# Altium PCB PCB1.PcbDoc (part 1 of 2)
Units mm, origin at the board's own origin, x right, y up, seen from the top; angles counter-clockwise.
Board outline 88.4 x 52.7 mm, 4 copper layers (Top Layer, Mid-Layer 1, Mid-Layer 2, Bottom Layer), stack 1.341 mm thick; 54 components, 31 nets, 188 pads, 80 vias.
Unrouted connection lines stored in the file: 1.
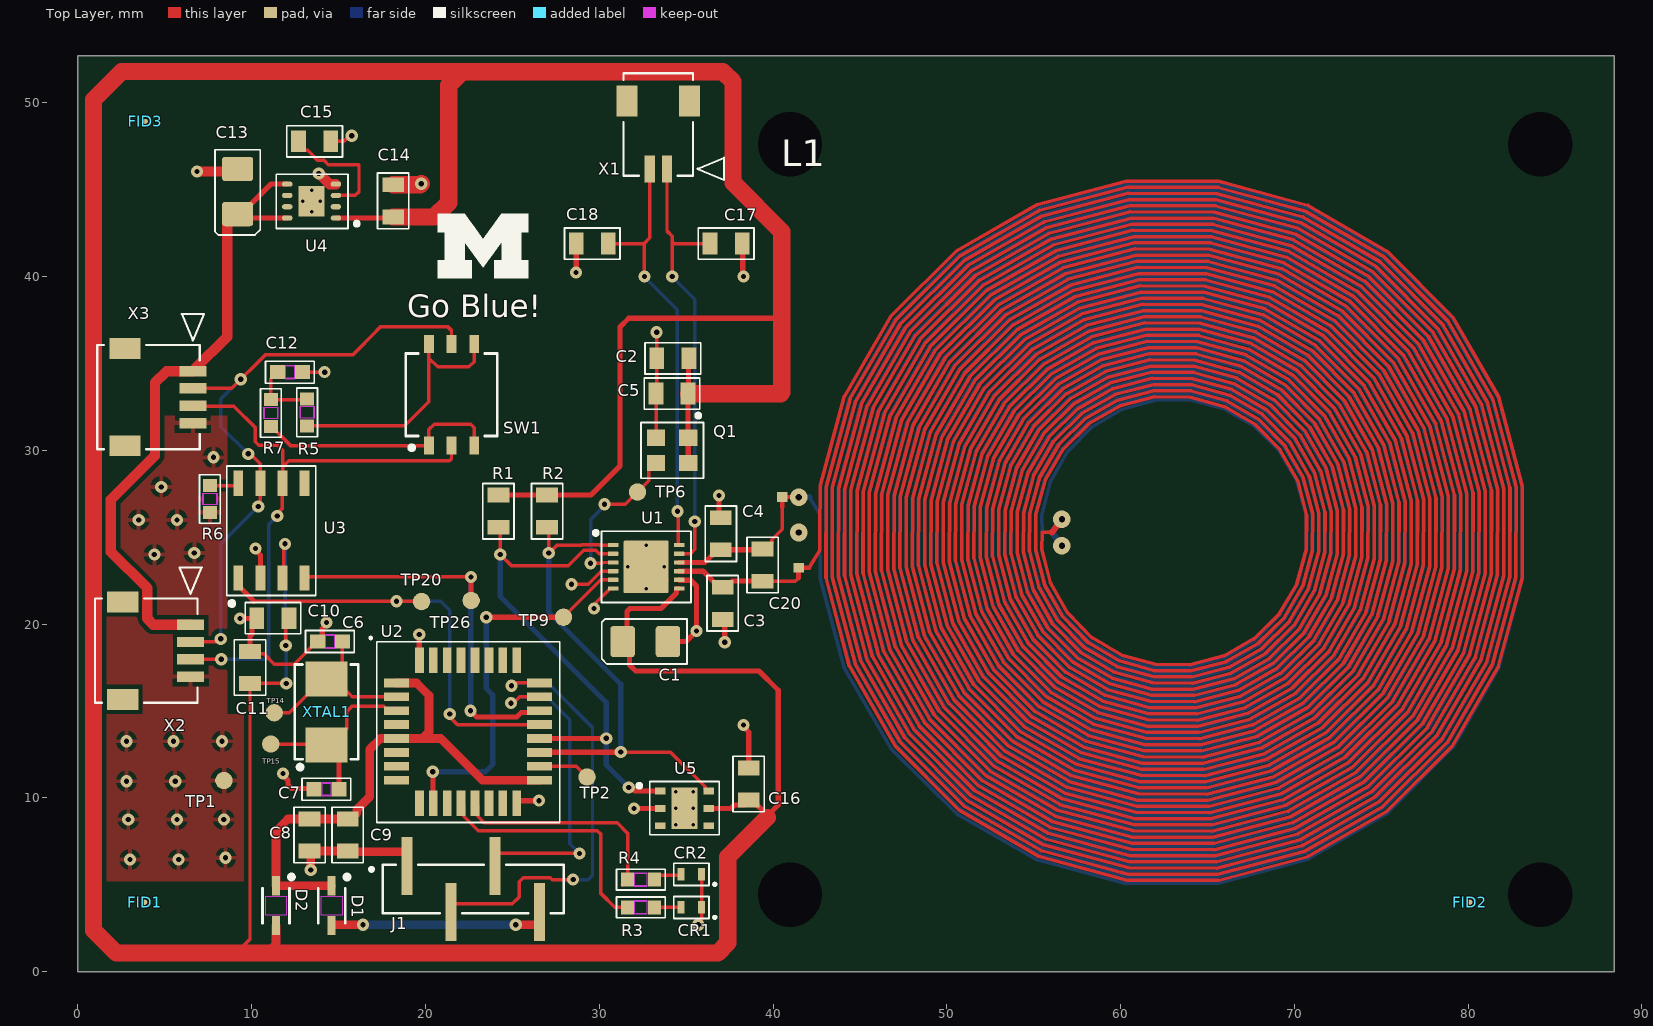
[diagram p0: Top Layer view]
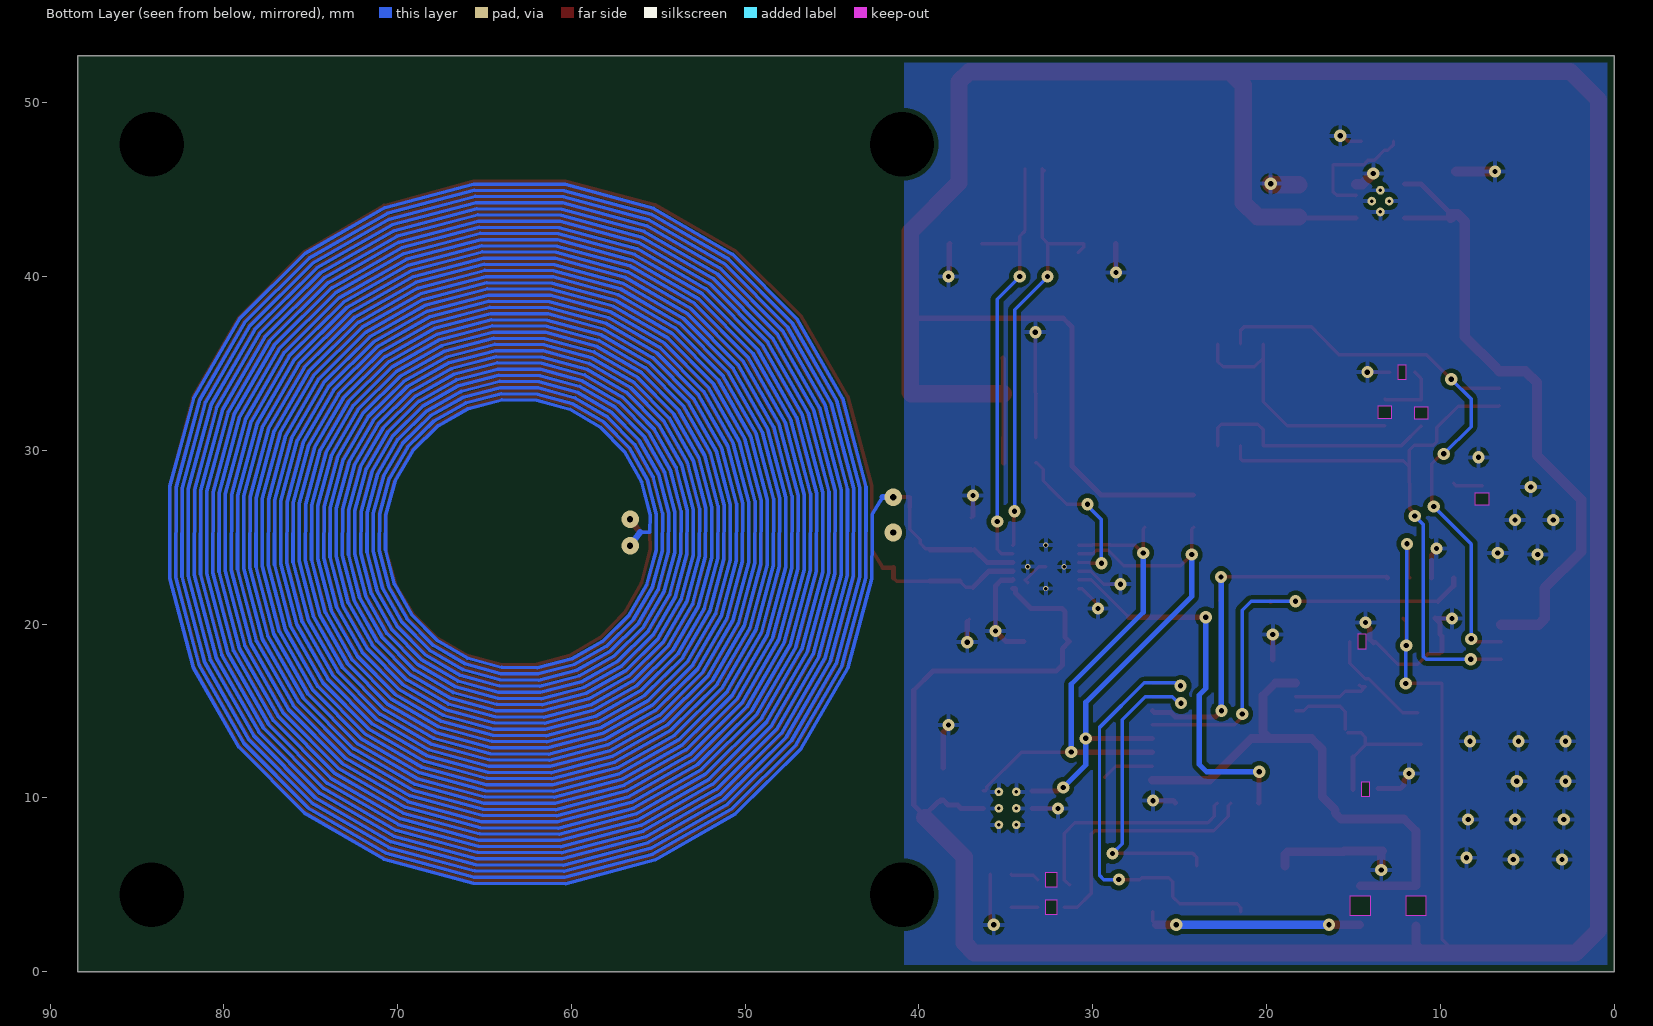
[diagram p1: Bottom Layer view, seen from below]
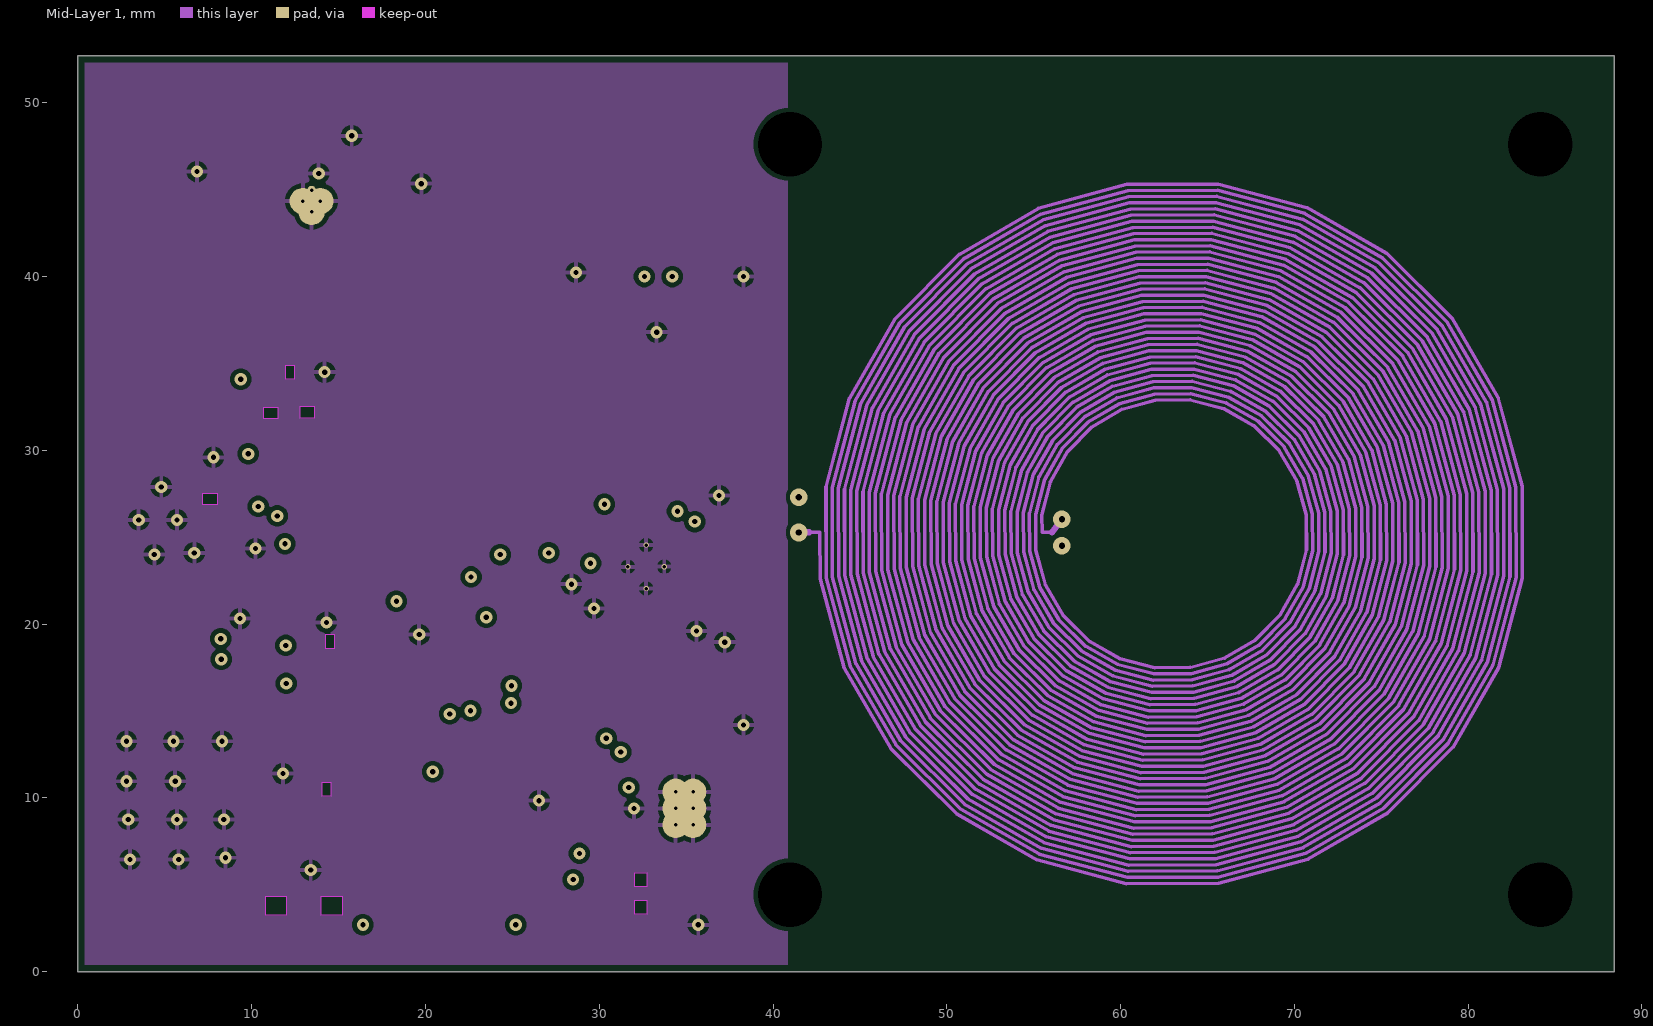
[diagram p2: Mid-Layer 1]
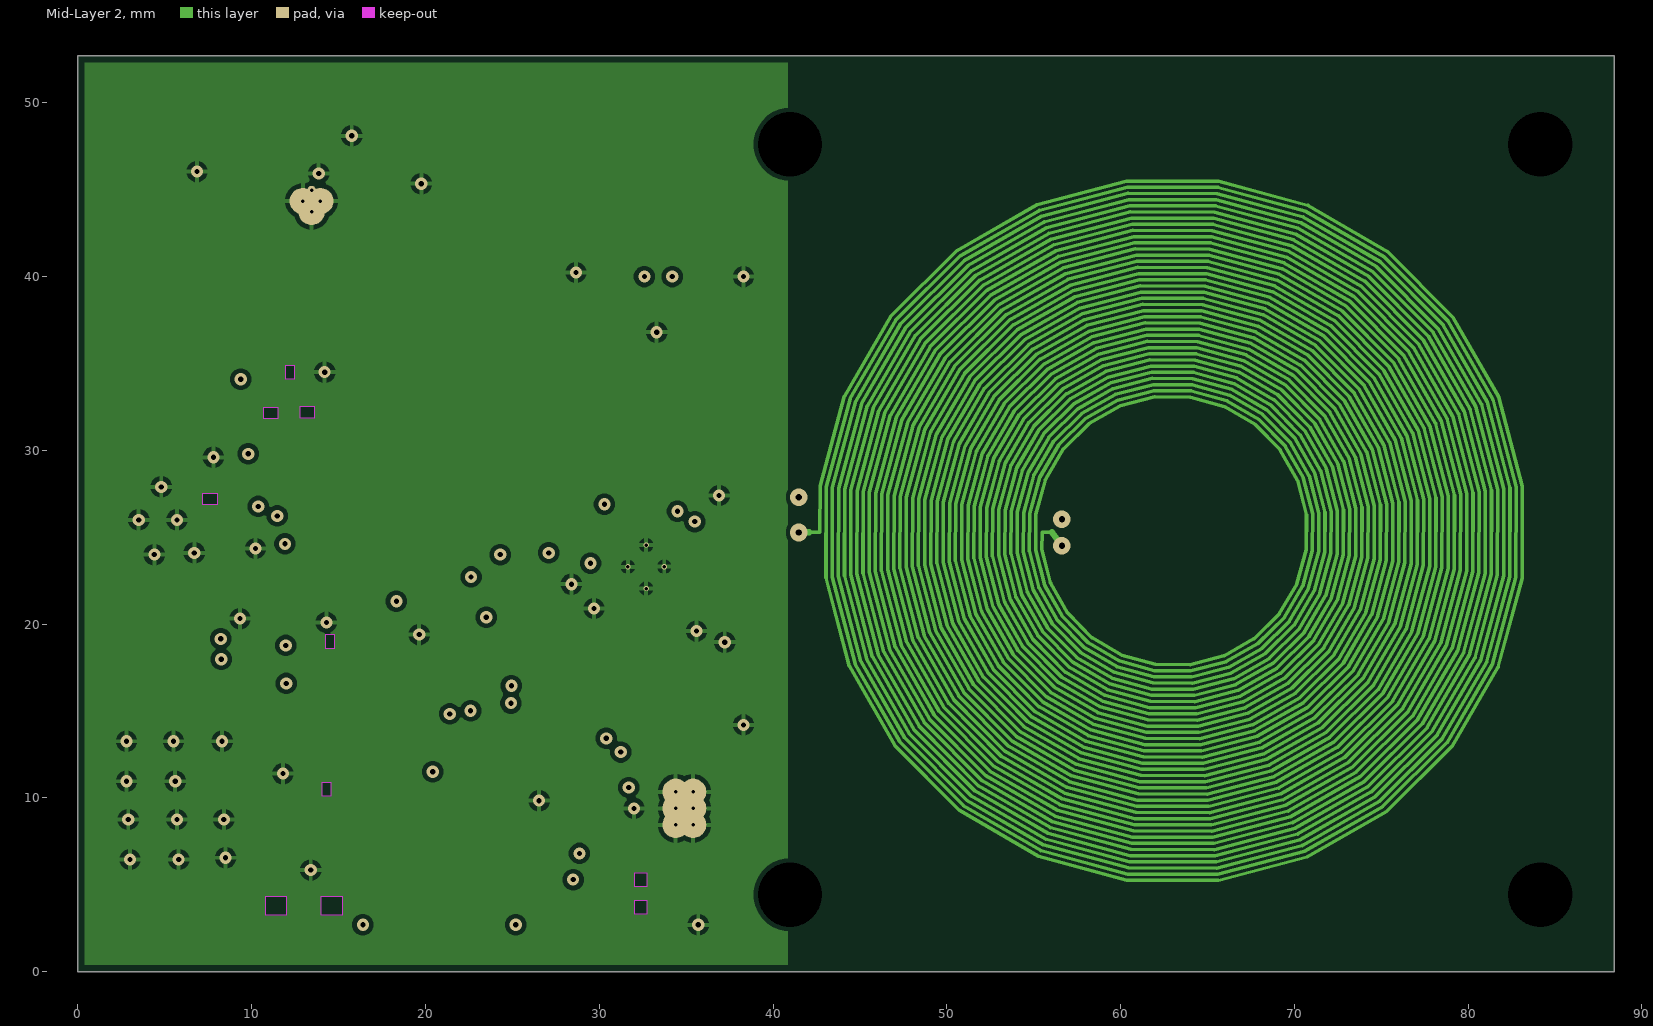
[diagram p3: Mid-Layer 2]
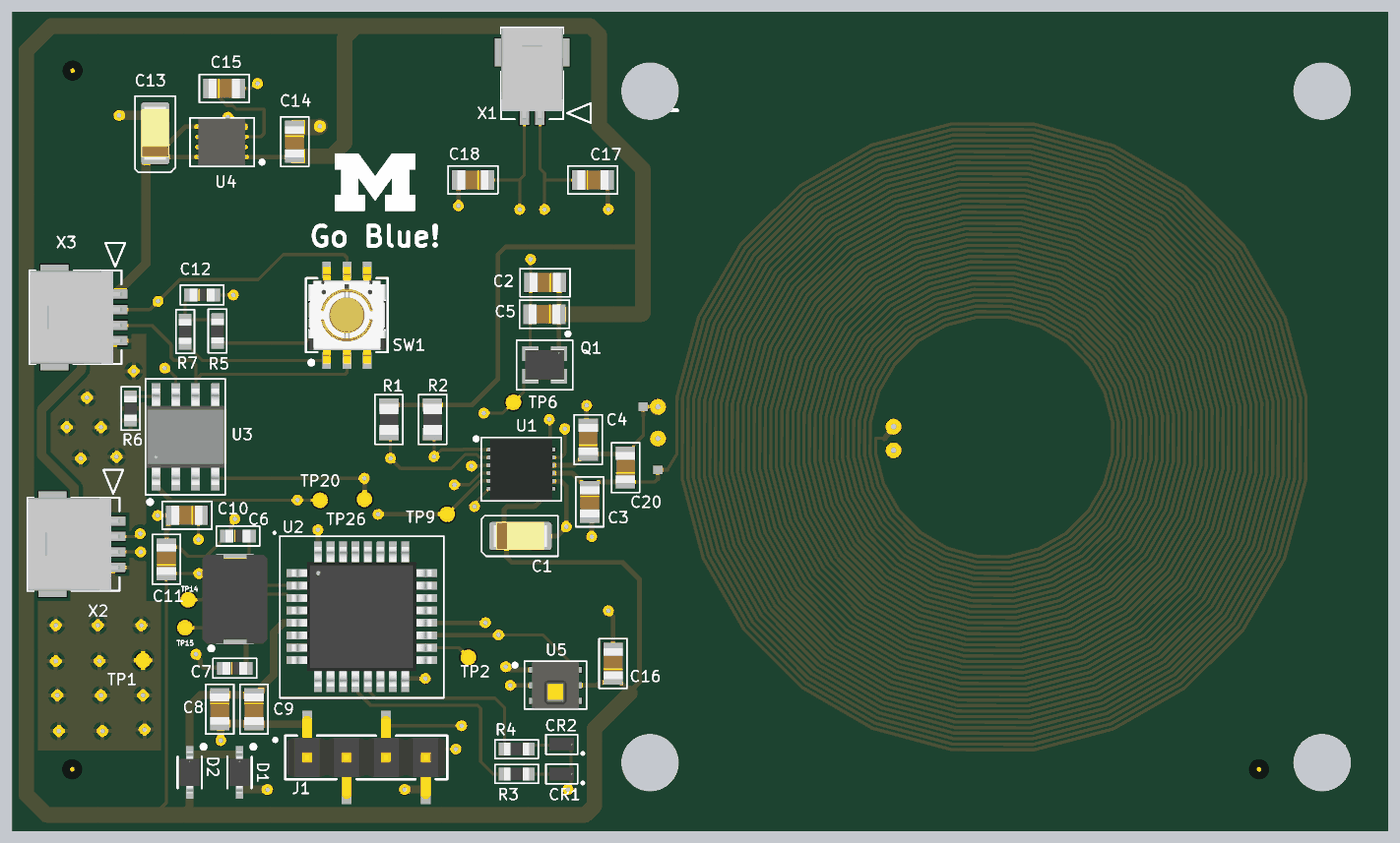
[diagram p4: 3D render of the assembled board from above, using the file's embedded part models]

## Layer stack, top to bottom
Top Solder: solder mask 0.0102, Solder Resist, Dk 3.5
Top Layer: signal copper 0.035
Dielectric 1: dielectric 0.4, FR-4, Dk 4.8
Mid-Layer 1: signal copper 0.0356
Dielectric3: dielectric 0.4, FR-4, Dk 4.8
Mid-Layer 2: signal copper 0.0356
Dielectric2: dielectric 0.4, FR-4, Dk 4.8
Bottom Layer: signal copper 0.035
Bottom Solder: solder mask 0.0102, Solder Resist, Dk 3.5

## Board outline
0,0 88.4,0 88.4,52.7 0,52.7

## Design rules (kind name [scope] priority, off if disabled: settings)
BoardOutlineClearance [All] p1: gap=0.254 ignorepadtopadclearanceinfootprint=FALSE except(0: Arc-SplitContinuation Track-SplitContinuation SMDPad-SplitContinuation THPad-SplitContinuation Via-SplitContinuation Fill-SplitContinuation Poly-SplitContinuation Region-SplitContinuation Text-SplitContinuation; 0.4: Arc-OutlineEdge Track-OutlineEdge SMDPad-OutlineEdge THPad-OutlineEdge Via-OutlineEdge Fill-OutlineEdge Poly-OutlineEdge Region-OutlineEdge Text-OutlineEdge)
Clearance keepout [IsKeepOut] p1: gap=0 ignorepadtopadclearanceinfootprint=TRUE
Clearance [All] p2: gap=0.254 ignorepadtopadclearanceinfootprint=TRUE except(0: Arc-Fill Track-Fill SMDPad-Fill THPad-Fill Via-Fill Fill-Fill Text-Hole; 0.1: Arc-Track Track-Track; 0.127: Arc-Arc SMDPad-SMDPad; 0.2: Arc-SMDPad Track-SMDPad; 0.33: Arc-THPad Track-THPad SMDPad-THPad; 0.5: Arc-Hole Track-Hole THPad-THPad THPad-Hole Via-Hole)
HoleSize [All] p1: absolutevalues=TRUE maxlimit=5 minlimit=0.2 maxpercent=80.000 minpercent=20.000
MinimumAnnularRing [All] p1: minimumring=0.13
MinimumSolderMaskSliver [All] p1: minsoldermaskwidth=0.127
PolygonConnect [All] p1: connectstyle=Relief reliefconductorwidth=0.254 reliefentries=4 polygonreliefangle="90 Angle" airgapwidth=0.254
RoutingVias [All] p1: holewidth=0.3 width=0.7 viastyle="Through Hole" minholewidth=0.3 minwidth=0.7 maxholewidth=0.711 maxwidth=1.27
SilkToSilkClearance [All] p1: silktosilkclearance=0.15
SilkToSolderMaskClearance [IsPad] p1: minsilkscreentomaskgap=0.15 clearancetoexposedcopper=FALSE
SolderMaskExpansion [All] p1: expansion=0.038 istentingtop=FALSE
UnRoutedNet [All] p1: checkbadconnections=TRUE
Width [All] p1: maxlimit=10 minlimit=0.127 preferedwidth=0.3 bottomlayer_prefwidth=0.2 minimp=50.000000 maximp=50.000000 favimp=50.000000
25 further rules are at their usual default settings.

## Classes and differential pairs
component class Sheet1: FID1 FID2 FID3
component class Sense_LDC1612: C1 C2 C3 C4 C5 C17 C18 C20 L1 Q1 R1 R2 TP6 TP9 U1 X1
component class PowerReg: C13 C14 C15 TP1 U4
component class Microcontroller_STM32F04: C6 C7 C8 C9 CR1 CR2 D1 D2 J1 R3 R4 TP2 TP14 TP15 U2 XTAL1
component class HumTempSensor: C16 U5
component class CAN_TxRx: C10 C11 C12 R5 R6 R7 SW1 TP20 TP26 U3
component class BoardIF: X2 X3

## Components (designator, comment, footprint, x,y, rotation, side; value= is the part's Value field where it differs from the comment)
C1 "10uF" CAP1206_TAJA 32.5,19.1 r0 top value="10uF 16V 10% Tantalum"
C2 "1uF" CAP0805 34.237,35.295 r180 top value="1uF 50V"
C3 "18pF" CAP0805 37.1,21.2 r270 top value="18pF 50V"
C4 "18pF" CAP0805 37,25.2 r90 top value="18pF 50V"
C5 "100nF" CAP0805 34.191,33.267 r180 top value="100nF 50V"
C6 "20pF" C0603 14.5,19 r0 top value="20pF 50V"
C7 "20pF" C0603 14.3,10.5 r0 top value="20pF 50V"
C8 "100nF" CAP0805 13.333,7.87 r270 top value="100nF 50V"
C9 "100nF" CAP0805 15.525,7.866 r270 top value="100nF 50V"
C10 "100nF" CAP0805 11.224,20.34 r180 top value="100nF 50V"
C11 "100nF" CAP0805 9.905,17.504 r90 top value="100nF 50V"
C12 "4.7nF" C0603 12.2,34.5 r0 top value="4.7nF 100V"
C13 "10uF" CAP1206_TAJA 9.087,44.745 r90 top value="10uF 16V 10% Tantalum"
C14 "4.7uF" CAP0805 18.145,44.356 r270 top value="4.7uF 25V"
C15 "100nF" CAP0805 13.621,47.784 r0 top value="100nF 50V"
C16 "100nF" CAP0805 38.6,10.8 r90 top value="100nF 50V"
C17 "18pF" CAP0805 37.3,41.9 r0 top value="18pF 50V"
C18 "18pF" CAP0805 29.6,41.9 r180 top value="18pF 50V"
C20 "510pF" CAP0805 39.4,23.4 r90 top value="510pF 50V"
CR1 "GRN" LED_VISHAY_VLMX1300_VIS 35.3,3.7 r180 top value="LED Green"
CR2 "RED" LED_VISHAY_VLMX1300_VIS 35.3,5.6 r180 top value="LED Red"
D1 "CUS10S30,H3F" USC_TOS 14.6,3.8 r270 top
D2 "CUS10S30,H3F" USC_TOS 11.4,3.8 r270 top
FID1 "Fiducial" FID 3.85,4 r90 top
FID2 "Fiducial" FID 80.1,4 r90 top
FID3 "Fiducial" FID 3.877,48.931 r90 top
J1 "TSM-104-01-T-SV" CONN_TSM-104-01-T-SV_SAI 22.745,4.766 r0 top
L1 "SenseCoil" COIL_4L 41.483,25.273 r0 top
Q1 "40MHz" KC2520Z_KYO 34.2,30 r270 top value=KC2520Z40.0000C15XXK
R1 "4.7k" RES0805 24.2,26.5 r270 top value=4.7kR
R2 "4.7k" RES0805 27,26.5 r270 top value=4.7kR
R3 "330R" R0603 32.4,3.7 r0 top
R4 "330R" R0603 32.4,5.3 r0 top
R5 "60.4R" R0603 13.189,32.183 r90 top
R6 "10k" R0603 7.6,27.2 r270 top value=10kR
R7 "60.4R" R0603 11.107,32.149 r270 top
SW1 "CS-4-22YB" CS-4-22YB_NDC 21.5,33.2 r90 top value=CS-4-22YTB
TP1 "1mm Test Point" TP_1MM 8.4,11 r90 top
TP2 "1mm Test Point" TP_1MM 29.3,11.2 r90 top
TP6 "1mm Test Point" TP_1MM 32.2,27.6 r90 top
TP9 "1mm Test Point" TP_1MM 27.941,20.4 r90 top
TP14 "1mm Test Point" TP_1MM 11.3,14.9 r90 top
TP15 "1mm Test Point" TP_1MM 11.1,13.1 r90 top
TP20 "1mm Test Point" TP_1MM 19.779,21.299 r90 top
TP26 "1mm Test Point" TP_1MM 22.631,21.364 r90 top
U1 "Inductive Sensor 2Ch" LDC1612 30.8,24.55 r0 top value=LDC1612DNTR
U2 "STM32F042K6T7" LQFP-32 22.45,13.818 r0 top
U3 "SN65HVD230DR" SOIC_8 11.139,25.379 r90 top
U4 "3.3V/1A" VSON_DRB8 13.447,44.344 r180 top value=TPS73733QDRBRQ1
U5 "I2C Humidity/Temp Sensor" WSON_DMB6 34.9,9.4 r0 top value=HDC1080DMBR
X1 "2P Pico-Clasp" CON_2023960207 33.9,46.2 r180 top value=2023960207
X2 "4P Pico-clasp" CON_2023960407 6.489,19.974 r270 top value=2023960407
X3 "4P Pico-clasp" CON_2023960407 6.616,34.564 r270 top value=2023960407
XTAL1 "XC53G2-8.000-F12NJHPK" XTAL_NX5032_NDK 14.312,14.947 r90 top

## Footprints (in the part's own frame and the unit in brackets; to place one, negate y for a bottom-side part, rotate by r counter-clockwise, add the part's x,y. Pads: shape width x height; smd on the part's side, far side on the other; paste and mask are expansions set on the pad)
C0603 [mil]
  rect 33.78x32 smd paste+0 mask+0: 1(-28.39,0) 2(28.39,0)
  Top Layer keep-out region: -9.5,-14 -9.5,14 9.5,14 9.5,-14
  Keep-Out Layer region: -9.5,-16 -9.5,16 9.5,16 9.5,-16
  silkscreen extent -55,-25 55,25, body extent -31,-16 31,16, height 35
CAP0805 [mm]
  rect 0.85x1.25 smd: 1(-0.925,0) 2(0.925,0)
  silkscreen extent -1.6,-0.9 1.6,0.9, body extent -1,-0.63 1,0.63, height 1.35
CAP1206_TAJA [mm]
  rrect25% 1.4x1.8 smd: 1(-1.15,-0.1) 2(1.45,-0.1)
  silkscreen extent -2.35,-1.4 2.55,1.2, body extent -1.55,-1 1.85,0.8, height 1.85
COIL_4L [mil]
  rect 24x22 smd: 1(-0.34,-79.53) 2(-37.08,80.47)
  Top Layer drawing of 872 lines, arcs and shapes, not listed
  Mid-Layer 1 drawing of 869 lines, arcs and shapes, not listed
  Mid-Layer 2 drawing of 869 lines, arcs and shapes, not listed
  Bottom Layer drawing of 870 lines, arcs and shapes, not listed
CON_2023960207 [mm]
  rect 0.6x1.55 smd paste+0 mask+0.076: 1(0,0) 2(1,0)
  rect 1.2x1.8 smd paste+0 mask+0.076: 3(-1.3,-3.9) 4(2.3,-3.9)
  silkscreen extent -3.28,-5.5 2.5,0.63, body extent -1.5,-5.48 2.5,0.43, height 3.2
CON_2023960407 [mm]
  rect 0.6x1.55 smd paste+0 mask+0.076: 1(0,0) 2(1,0) 3(2,0) 4(3,0)
  rect 1.2x1.8 smd paste+0 mask+0.076: 5(-1.3,-3.9) 6(4.3,-3.9)
  silkscreen extent -3.28,-5.5 4.5,0.63, body extent -1.5,-5.48 4.5,0.43, height 3.2
CONN_TSM-104-01-T-SV_SAI [mil]
  rect 25x131.56 smd paste+0 mask+0: 1(-150,52) 2(-50,-52) 3(50,52) 4(150,-52)
  silkscreen extent -233,-55 205,55, body extent -200,-104 200,104, height 398
CS-4-22YB_NDC [mil]
  rect 41.56x21.97 smd paste+0 mask+0: 1(-115,51.18) 2(-115,0) 3(-115,-51.18) 4(115,-51.18) 5(115,0) 6(115,51.18)
  silkscreen extent -125,-104 94,104, body extent -122,-98 122,98, height 92
FID [mm]
  round 0.3 smd paste-1 mask+0.5: 2(0,0)
KC2520Z_KYO [mil]
  rect 37x41 smd paste+0 mask+0: 1(-28.5,36.42) 2(-28.5,-36.42) 3(28.5,-36.42) 4(28.5,36.42)
  silkscreen extent -83,-71 63,71, body extent -39,-49 39,49, height 32
LDC1612 [mm]
  rrect25% 0.6x0.25 smd: 1(0,0) 2(0,-0.5) 3(0,-1) 4(0,-1.5) 5(0,-2) 6(0,-2.5) 7(3.8,-2.5) 8(3.8,-2) 9(3.8,-1.5) 10(3.8,-1) 11(3.8,-0.5) 12(3.8,0)
  rrect5% 2.6x3 smd paste-2.6 mask+0.102: 13(1.9,-1.25)
  silkscreen extent -1.1,-3.3 4.47,0.8, body extent -0.1,-3.25 3.9,0.75, height 0.8
LED_VISHAY_VLMX1300_VIS [mil]
  rect 16x28 smd paste+0 mask+0: 1(-23.5,0) 2(23.5,0)
  silkscreen extent -56,-25 40,26, body extent -31,-16 31,16, height 32
LQFP-32 [mm]
  rect 1.462x0.507 smd paste+0 mask+0: 1(-4.115,2.8) 2(-4.115,2) 3(-4.115,1.2) 4(-4.115,0.4) 5(-4.115,-0.4) 6(-4.115,-1.2) 7(-4.115,-2) 8(-4.115,-2.8) 17(4.115,-2.8) 18(4.115,-2) 19(4.115,-1.2) 20(4.115,-0.4) 21(4.115,0.4) 22(4.115,1.2) 23(4.115,2) 24(4.115,2.8)
  rect 0.507x1.462 smd paste+0 mask+0: 9(-2.8,-4.115) 10(-2,-4.115) 11(-1.2,-4.115) 12(-0.4,-4.115) 13(0.4,-4.115) 14(1.2,-4.115) 15(2,-4.115) 16(2.8,-4.115) 25(2.8,4.115) 26(2,4.115) 27(1.2,4.115) 28(0.4,4.115) 29(-0.4,4.115) 30(-1.2,4.115) 31(-2,4.115) 32(-2.8,4.115)
  silkscreen extent -5.61,-5.23 5.28,5.4, body extent -4.5,-4.5 4.5,4.5, height 1.6
R0603 [mil]
  rect 29.78x32 smd paste+0 mask+0: 1(-30.39,0) 2(30.39,0)
  Top Layer keep-out region: -13.5,-14 -13.5,14 13.5,14 13.5,-14
  Keep-Out Layer region: -13.5,-16 -13.5,16 13.5,16 13.5,-16
  silkscreen extent -55,-24 55,24, body extent -31,-16 31,16, height 28
RES0805 [mm]
  rect 0.85x1.25 smd: 1(-0.925,0) 2(0.925,0)
  silkscreen extent -1.6,-0.9 1.6,0.9, body extent -1,-0.6 1,0.6, height 0.71
SOIC_8 [mm]
  rect 1.455x0.558 smd paste+0 mask+0: 1(-2.721,1.905) 2(-2.721,0.635) 3(-2.721,-0.635) 4(-2.721,-1.905) 5(2.721,-1.905) 6(2.721,-0.635) 7(2.721,0.635) 8(2.721,1.905)
  silkscreen extent -4.32,-2.55 3.72,2.58, body extent -3.1,-2.5 3.1,2.5, height 1.76
TP_1MM [mm] "1mm test point"
  round 1 smd paste-1 mask+0.102: 1(0,0)
USC_TOS [mm]
  rect 1.1x0.46 smd paste+0 mask+0: 1(-1.15,0) 2(1.15,0)
  Keep-Out Layer region: -0.549,-0.599 -0.549,0.599 0.549,0.599 0.549,-0.599
  silkscreen extent -1.78,-0.78 1,1.02, body extent -1.35,-0.65 1.35,0.65, height 1.1
VSON_DRB8 [mm]
  oval 0.6x0.3 smd paste-0.102 mask+0.051: 1(-1.4,0.975) 2(-1.4,0.325) 3(-1.4,-0.325) 4(-1.4,-0.975) 5(1.4,-0.975) 6(1.4,-0.325) 7(1.4,0.325) 8(1.4,0.975)
  round 0.5 / inner round 1.524 / far side round 0.5 hole 0.2 paste-0.25 mask+0.051: 9(-0.5,0) 9(0,0.625) 9(0.5,0)
  round 0.5 hole 0.2 paste-0.25 mask+0.051: 9(0,-0.625)
  rect 1.5x1.75 smd paste-0.875 mask+0.051: 9(0,0)
  silkscreen extent -2.7,-1.55 2.02,1.58, body extent -1.5,-1.5 1.5,1.5, height 0.77
WSON_DMB6 [mm]
  rect 0.6x0.4 smd paste+0 mask+0.051: 1(-1.4,1) 2(-1.4,0) 3(-1.4,-1) 4(1.4,-1) 5(1.4,0) 6(1.4,1)
  round 0.5 / inner round 1.524 / far side round 0.5 hole 0.2 paste-0.25 mask+0.051: 7(-0.5,-0.95) 7(-0.5,0) 7(-0.5,0.95) 7(0.5,-0.95) 7(0.5,0) 7(0.5,0.95)
  rect 1.5x2.4 smd paste-1.187 mask+0.051: 7(0,0)
  silkscreen extent -2.7,-1.53 2,1.55, body extent -1.5,-1.5 1.5,1.5, height 0.8
XTAL_NX5032_NDK [mm]
  rect 2x2.4 smd paste+0 mask+0: 1(-1.9,0) 2(1.9,0)
  silkscreen extent -3.3,-1.83 2.73,1.83, body extent -2.86,-2.09 2.86,2.09, height 1.5

## Part data
C1 C13: library part TAJA106K016RNJ, "Cap Tant Solid 10uF 16V A CASE 10%( 3.2 X 1.6 X 1.6mm) Inward L SMD 3216-18 3 Ohm 125C T/R", Case Code (Imperial)=1206, Case Code (Metric)=3216, Dielectric Material=Tantalum, ESR (Equivalent Series Resistance)=3R, Frequency=300MHz, LCSC Part#=C7171, Leakage Current=1.6uA, Manufacturer="Kyocera AVX", Max Operating Temperature=125°C, Mfr_Name="KYOCERA AVX", Min Operating Temperature=-55°C, Package Quantity=1, Ripple Current=158mA, Supplier Part Number=478-1655-6-ND, Tolerance=10%, Voltage=16V, Case/Package=1206, Category="Tantalum Capacitors", ComponentLink1Description=https://datasheet.ciiva.com/27051/1234933-27051768.pdf?src-supplier=Jameco, ComponentLink1URL=https://datasheet.ciiva.com/27051/1234933-27051768.pdf?src-supplier=Jameco, ComponentLink2Description=https://datasheet.ciiva.com/26341/559411-da-01-en-tacc-a-3-2-mm-x-1-6-mm-x-1-6-mm-10-uf-26341755.pdf?src-supplier=Conrad, ComponentLink2URL=https://datasheet.ciiva.com/26341/559411-da-01-en-tacc-a-3-2-mm-x-1-6-mm-x-1-6-mm-10-uf-26341755.pdf?src-supplier=Conrad, ComponentLink3Description=https://datasheet.ciiva.com/18710/taj-eng-18710622.pdf?src-supplier=Distrelec, ComponentLink3URL=https://datasheet.ciiva.com/18710/taj-eng-18710622.pdf?src-supplier=Distrelec, ComponentLink4Description=https://datasheet.ciiva.com/7730/1703059-7730712.pdf?src-supplier=Element14, ComponentLink4URL=https://datasheet.ciiva.com/7730/1703059-7730712.pdf?src-supplier=Element14, ComponentLink5Description=https://datasheet.ciiva.com/7730/1703059-7730713.pdf?src-supplier=Element14, ComponentLink5URL=https://datasheet.ciiva.com/7730/1703059-7730713.pdf?src-supplier=Element14, ComponentLink6Description=https://datasheet.ciiva.com/7730/taj-7730975.pdf?src-supplier=Element14, ComponentLink6URL=https://datasheet.ciiva.com/7730/taj-7730975.pdf?src-supplier=Element14, ComponentLink7Description=https://datasheet.ciiva.com/7730/1680476-7730714.pdf?src-supplier=Element14, ComponentLink7URL=https://datasheet.ciiva.com/7730/1680476-7730714.pdf?src-supplier=Element14, ComponentLink8Description=https://datasheet.ciiva.com/263/taj-263392.pdf?src-supplier=Digi-Key, ComponentLink8URL=https://datasheet.ciiva.com/263/taj-263392.pdf?src-supplier=Digi-Key, ComponentLink9Description=https://datasheet.ciiva.com/263/taj-263391.pdf?src-supplier=Digi-Key, ComponentLink9URL=https://datasheet.ciiva.com/263/taj-263391.pdf?src-supplier=Digi-Key, ComponentLink10Description=https://datasheet.ciiva.com/263/taj-263393.pdf?src-supplier=Digi-Key, ComponentLink10URL=https://datasheet.ciiva.com/263/taj-263393.pdf?src-supplier=Digi-Key, ComponentLink11Description=https://datasheet.ciiva.com/12882/taj-27497-12882509.pdf?src-supplier=Mouser, ComponentLink11URL=https://datasheet.ciiva.com/12882/taj-27497-12882509.pdf?src-supplier=Mouser, ComponentLink12Description=https://datasheet.ciiva.com/3004/taj-3004388.pdf?src-supplier=Avnet, ComponentLink12URL=https://datasheet.ciiva.com/3004/taj-3004388.pdf?src-supplier=Avnet, ComponentLink13Description=https://datasheet.ciiva.com/16379/taj-16379015.pdf?src-supplier=Future+Electronics, ComponentLink13URL=https://datasheet.ciiva.com/16379/taj-16379015.pdf?src-supplier=Future+Electronics, ComponentLink14Description=https://datasheet.ciiva.com/3004/taj-3004387.pdf?src-supplier=Avnet, ComponentLink14URL=https://datasheet.ciiva.com/3004/taj-3004387.pdf?src-supplier=Avnet, Construction=Flat, Copyright="Copyright (C) 2023 Ultra Librarian. All rights reserved.", Depth=1.6mm, Dissipation Factor=8%, Features="General Purpose", Height=1.6mm, Height - Seated (Max)=0.071inch, Lead Free="Lead Free", Lead Pitch=1.1mm, Length=3.2mm, Life (Hours)=2000Hour, Manufacturer Part Number=TAJA106K016RNJ, Manufacturer_Part_Number=TAJA106K016RNJ, Mounting Technology="Surface Mount,PCB", Packaging="Tape and Reel", Pins=2, Polarity=Polar, Pricing="1=0.35, 10=0.234, 50=0.1726, 100=0.1405, 500=0.1109, 1000=0.09365 (USD)", Radiation Hardening=No, Reach SVHC Compliant=No, RefDes=RefDes, RoHS=Yes, RoHS Compliant=Yes, Series=TAJ, Size=1.6mm, Stock=8878, Supplier=Digi-Key, Termination=SMD/SMT, Type=DEV, Voltage Rating=16V, Voltage Rating (AC)=16V, Voltage Rating (DC)=16V, Width=1.6mm
C2: library part CL21B105KBFNNNE, "Multilayer Ceramic Capacitor, 1 uF, 50 V, ± 10%, X7R, 0805 [2012 Metric]", Case Code (Imperial)=0805, Case Code (Metric)=2012, Dielectric=X7R, Dielectric Material=Tantalum, LCSC Part#=C28323, Manufacturer=Samsung, Max Operating Temperature=125°C, Min Operating Temperature=-55°C, Package Quantity=1, Supplier Part Number=1276-1029-1-ND, Temperature Coefficient=0ppm/°C, Tolerance=10%, Voltage=50V, Case/Package=0805, Category="Ceramic Capacitors", ComponentLink1Description=https://datasheet.ciiva.com/25800/cl21b105kbfnnne-25800291.pdf?src-supplier=Digi-Key, ComponentLink1URL=https://datasheet.ciiva.com/25800/cl21b105kbfnnne-25800291.pdf?src-supplier=Digi-Key, ComponentLink2Description=https://datasheet.ciiva.com/16511/vjw1bcbascomseries-16511277.pdf?src-supplier=Future+Electronics, ComponentLink2URL=https://datasheet.ciiva.com/16511/vjw1bcbascomseries-16511277.pdf?src-supplier=Future+Electronics, ComponentLink3Description=https://datasheet.ciiva.com/176/vjw1bcbascomseries-176732.pdf?src-supplier=Digi-Key, ComponentLink3URL=https://datasheet.ciiva.com/176/vjw1bcbascomseries-176732.pdf?src-supplier=Digi-Key, Construction=Flat, Depth=1.25mm, Height=1.25mm, Lead Free="Lead Free", Length=2mm, Manufacturer Part Number=CL21B105KBFNNNE, Material=Ceramic, Mounting Technology="Surface Mount", Packaging="Tape and Reel", Pins=2, Pricing="1=0.11, 10=0.075, 50=0.045, 100=0.0354, 500=0.02616, 1000=0.02165 (USD)", Radiation Hardening=No, RoHS=Yes, RoHS Compliant=Yes, Series=CL, Stock=1577316, Supplier=Digi-Key, Termination=SMD/SMT, Thickness=0.053inch, Voltage Rating=50V, Voltage Rating (DC)=50V, Width=0.049inch
C3 C4 C17 C18: library part VJ0805A180JXACW1BC, "0805 18 pF 50 V ±5 % Tolerance C0G/NP0 SMT Multilayer Ceramic Chip Capacitor", Case Code (Imperial)=0805, Case Code (Metric)=2012, Dielectric=C0G, Dielectric Material=Tantalum, LCSC Part#=C2174299, Manufacturer=Vishay, Max Operating Temperature=125°C, Min Operating Temperature=-55°C, Package Quantity=4000, Supplier Part Number=720-1628-1-ND, Temperature Coefficient=0ppm/°C, Tolerance=5%, Voltage Rating=50V, Case/Package=0805, Category="Ceramic Capacitors", ComponentLink1Description=https://datasheet.ciiva.com/16511/vjw1bcbascomseries-16511277.pdf?src-supplier=Future+Electronics, ComponentLink1URL=https://datasheet.ciiva.com/16511/vjw1bcbascomseries-16511277.pdf?src-supplier=Future+Electronics, ComponentLink2Description=https://datasheet.ciiva.com/176/vjw1bcbascomseries-176732.pdf?src-supplier=Digi-Key, ComponentLink2URL=https://datasheet.ciiva.com/176/vjw1bcbascomseries-176732.pdf?src-supplier=Digi-Key, Construction=Flat, Depth=1.25mm, Height=1.45mm, Lead Free="Lead Free", Length=2mm, Manufacturer Part Number=VJ0805A180JXACW1BC, Mounting Technology="Surface Mount", Packaging="Tape and Reel", Pins=2, Pricing="1=0.2, 10=0.132, 50=0.079, 100=0.0622, 500=0.0459, 1000=0.038 (USD)", Radiation Hardening=No, RoHS=Yes, RoHS Compliant=Yes, Series=VJ, Stock=4074, Supplier=Digi-Key, Termination=SMD/SMT, Thickness=0.03inch, Voltage Rating (DC)=50V, Width=1.25mm
C5 C8 C9 C10 C11 C15 C16: library part CC0805KRX7R9BB104, "Multilayer Ceramic Capacitor, 0.1 uF, 50 V, ± 10%, X7R, 0805 [2012 Metric]", Case Code (Imperial)=0805, Case Code (Metric)=2012, Dielectric=X7R, Insulation Resistance=100GR, LCSC Part#=C49678, Manufacturer=Yageo, Max Operating Temperature=125°C, Min Operating Temperature=-55°C, Package Quantity=4000, Supplier Part Number=311-1140-1-ND, Tolerance=10%, Voltage=50V, Case/Package=0805, Category="Ceramic Capacitors", ComponentLink1Description=https://datasheet.ciiva.com/11786/0900766b80d84f1d-11786009.pdf?src-supplier=Rs, ComponentLink1URL=https://datasheet.ciiva.com/11786/0900766b80d84f1d-11786009.pdf?src-supplier=Rs, ComponentLink2Description=https://datasheet.ciiva.com/46393/1734573-46393307.pdf?src-supplier=Element14, ComponentLink2URL=https://datasheet.ciiva.com/46393/1734573-46393307.pdf?src-supplier=Element14, ComponentLink3Description=https://datasheet.ciiva.com/155/mlccorderingcode-155930.pdf?src-supplier=Digi-Key, ComponentLink3URL=https://datasheet.ciiva.com/155/mlccorderingcode-155930.pdf?src-supplier=Digi-Key, ComponentLink4Description=https://datasheet.ciiva.com/155/mlccorderingcode-155929.pdf?src-supplier=Digi-Key, ComponentLink4URL=https://datasheet.ciiva.com/155/mlccorderingcode-155929.pdf?src-supplier=Digi-Key, ComponentLink5Description=https://datasheet.ciiva.com/155/mlccorderingcode-155931.pdf?src-supplier=Digi-Key, ComponentLink5URL=https://datasheet.ciiva.com/155/mlccorderingcode-155931.pdf?src-supplier=Digi-Key, ComponentLink6Description=https://datasheet.ciiva.com/11464/upy-gphc-x7r-6-3v-to-50v-8-11464757.pdf?src-supplier=Avnet, ComponentLink6URL=https://datasheet.ciiva.com/11464/upy-gphc-x7r-6-3v-to-50v-8-11464757.pdf?src-supplier=Avnet, ComponentLink7Description=https://datasheet.ciiva.com/28450/1489800-28450805.pdf?src-supplier=Element14, ComponentLink7URL=https://datasheet.ciiva.com/28450/1489800-28450805.pdf?src-supplier=Element14, ComponentLink8Description=https://datasheet.ciiva.com/29242/445210-da-01-en-kerko-chip-0805-x7r-0-1uf-10proz-50vg-29242074.pdf?src-supplier=Conrad, ComponentLink8URL=https://datasheet.ciiva.com/29242/445210-da-01-en-kerko-chip-0805-x7r-0-1uf-10proz-50vg-29242074.pdf?src-supplier=Conrad, Depth=1.25mm, Halogen Free="Halogen Free", Height=0.85mm, Lead Free="Lead Free", Length=2mm, Manufacturer Part Number=CC0805KRX7R9BB104, Material=Ceramic, Mounting Technology="Surface Mount", Packaging="Tape and Reel", Pins=2, Pricing="1=0.1, 10=0.07, 50=0.0418, 100=0.0329, 500=0.02428, 1000=0.0201 (USD)", Radiation Hardening=No, Reach SVHC Compliant=No, RoHS=Yes, RoHS Compliant=Yes, Series=CC, Stock=6426664, Supplier=Digi-Key, Termination=SMD/SMT, Voltage Rating=50V
C6 C7: library part CL10C200JB8NNNC, "Multilayer Ceramic Capacitor, 20 pF, 50 V, ± 5%, C0G (NP0), 0603 [1608 Metric]", Case Code (Imperial)=0603, Case Code (Metric)=1608, Dielectric=C0G, LCSC Part#=C1648, Manufacturer=Samsung, Max Operating Temperature=125°C, Min Operating Temperature=-55°C, Package Quantity=1, Supplier Part Number=1276-1187-1-ND, Temperature Coefficient=300ppm/°C, Tolerance=5%, Voltage=50V, Case/Package=0603, Category="Ceramic Capacitors", ComponentLink1Description=https://datasheet.ciiva.com/26877/getdatasheetpartid-640634-26877974.pdf?src-supplier=Verical, ComponentLink1URL=https://datasheet.ciiva.com/26877/getdatasheetpartid-640634-26877974.pdf?src-supplier=Verical, ComponentLink2Description=https://datasheet.ciiva.com/26310/mlcc-catalogdownload2013-eng-26310315.pdf?src-supplier=Distrelec, ComponentLink2URL=https://datasheet.ciiva.com/26310/mlcc-catalogdownload2013-eng-26310315.pdf?src-supplier=Distrelec, Construction=Flat, Depth=0.8mm, Height=0.8mm, Length=1.6mm, Manufacturer Part Number=CL10C200JB8NNNC, Mounting Technology="Surface Mount", Packaging="Tape and Reel", Pricing="1=0.1, 10=0.041, 50=0.0238, 100=0.0184, 500=0.01386, 1000=0.01089 (USD)", Radiation Hardening=No, RoHS=Yes, RoHS Compliant=Yes, Series=CL, Stock=379574, Supplier=Digi-Key, Thickness=0.035inch, Voltage Rating=50V, Voltage Rating (DC)=50V, Width=0.031inch
C12: library part C0603C472K1TACAUTO, "Cap Cer 0603 4.7NF 100VDC X8G", LCSC Part#=C3882427, Manufacturer=KEMET, Package=0603, Supplier Part Number=399-C0603C472K1TACAUTOCT-ND, Category="Ceramic Capacitors", Manufacturer Part Number=C0603C472K1TACAUTO, Pricing="1=0.42, 10=0.284, 50=0.2264, 100=0.1869, 500=0.14604, 1000=0.12414 (USD)", RoHS=No, Stock=10636, Supplier=Digi-Key
C14: library part CL21A475KAQNNNE, "Multilayer Ceramic Capacitor, 4.7 uF, 25 V, ± 10%, X5R, 0805 [2012 Metric]", Case Code (Imperial)=0805, Case Code (Metric)=2012, Dielectric=X5R, LCSC Part#=C1779, Manufacturer=Samsung, Max Operating Temperature=85°C, Min Operating Temperature=-55°C, Supplier Part Number=1276-1244-1-ND, Tolerance=10%, Voltage Rating=25V, Case/Package=0805, Category="Ceramic Capacitors", ComponentLink1Description=https://datasheet.ciiva.com/25798/cl21a475kaqnnne-25798882.pdf?src-supplier=Digi-Key, ComponentLink1URL=https://datasheet.ciiva.com/25798/cl21a475kaqnnne-25798882.pdf?src-supplier=Digi-Key, Construction=Flat, Depth=1.25mm, Height=1.25mm, Lead Free="Lead Free", Length=2mm, Manufacturer Part Number=CL21A475KAQNNNE, Material=Ceramic, Mounting Technology="Surface Mount", Packaging="Tape and Reel", Pricing="1=0.1, 10=0.069, 50=0.0414, 100=0.0326, 500=0.02408, 1000=0.01994 (USD)", Radiation Hardening=No, RoHS=Yes, RoHS Compliant=Yes, Series=CL, Stock=3502142, Supplier=Digi-Key, Voltage Rating (DC)=25V
C20: library part CC0805JRNPO9BN511, "0805 510 pF 50 V ±5 % Tolerance NP0 SMT Multilayer Ceramic Capacitor", Case Code (Imperial)=0805, Case Code (Metric)=2012, Dielectric=NP0, LCSC Part#=C309486, Manufacturer=Yageo, Max Operating Temperature=125°C, Min Operating Temperature=-55°C, Supplier Part Number=311-4240-1-ND, Tolerance=5%, Voltage Rating=50V, Case/Package=0805, Category="Ceramic Capacitors", ComponentLink1Description=http://www.mouser.com/ds/2/447/Yageo_UPY-GP_NP0_16V-to-50V_9-358835.pdf?src-supplier=Mouser, ComponentLink1URL=http://www.mouser.com/ds/2/447/Yageo_UPY-GP_NP0_16V-to-50V_9-358835.pdf?src-supplier=Mouser, ComponentLink2Description=https://www.yageo.com/upload/media/product/productsearch/datasheet/mlcc/UPY-GP_NP0_16V-to-50V_18.pdf?src-supplier=Digi-Key, ComponentLink2URL=https://www.yageo.com/upload/media/product/productsearch/datasheet/mlcc/UPY-GP_NP0_16V-to-50V_18.pdf?src-supplier=Digi-Key, ComponentLink3Description=http://www.yageo.com/documents/recent/UPY-GP_NP0_16V-to-50V_16.pdf?src-supplier=Digi-Key, ComponentLink3URL=http://www.yageo.com/documents/recent/UPY-GP_NP0_16V-to-50V_16.pdf?src-supplier=Digi-Key, ComponentLink4Description=http://www.yageo.com/exep/pages/download/literatures/ProductSelectionGuide%202014_Final_2.pdf?src-supplier=Digi-Key, ComponentLink4URL=http://www.yageo.com/exep/pages/download/literatures/ProductSelectionGuide%202014_Final_2.pdf?src-supplier=Digi-Key, ComponentLink5Description=http://www.yageo.com/documents/recent/UPY-GP_NP0_16V-to-50V_9.pdf?src-supplier=Future+Electronics, ComponentLink5URL=http://www.yageo.com/documents/recent/UPY-GP_NP0_16V-to-50V_9.pdf?src-supplier=Future+Electronics, ComponentLink6Description=https://datasheet.octopart.com/CC0805JRNPO9BN511-Yageo-datasheet-151948684.pdf?src-supplier=Newark, ComponentLink6URL=https://datasheet.octopart.com/CC0805JRNPO9BN511-Yageo-datasheet-151948684.pdf?src-supplier=Newark, Lead Free="Lead Free", Length=0.079inch, Manufacturer Part Number=CC0805JRNPO9BN511, Mounting Technology="Surface Mount", Packaging="Tape and Reel", Pricing="1=0.18, 10=0.119, 50=0.071, 100=0.0559, 500=0.04124, 1000=0.03415 (USD)", RoHS=Yes, Series=CC, Stock=4065, Supplier=Digi-Key, Termination=SMD/SMT, Thickness=0.028inch, Voltage Rating (DC)=50V, Weight=0.000194oz, Width=0.049inch
CR1: library part VLMG1300-GS08, "LED Uni-Color Yellow Green 574nm 2-Pin Chip 0603(1608Metric) T/R", Case Code (Imperial)=0603, Case Code (Metric)=1608, Color=Green,Yellow, Forward Current=20mA, Forward Voltage=2V, LCSC Part#=C4749244, Manufacturer="Vishay Semiconductors", Max Operating Temperature=85°C, Mfr_Name=Vishay, Min Operating Temperature=-35°C, Package Quantity=1, Power Dissipation=75mW, Reverse Voltage=5V, Supplier Part Number=VLMG1300-GS08CT-ND, Case/Package=0603, Category=LEDs, ComponentLink1Description=https://datasheet.ciiva.com/26322/vlmo1300-26322139.pdf?src-supplier=Element14, ComponentLink1URL=https://datasheet.ciiva.com/26322/vlmo1300-26322139.pdf?src-supplier=Element14, ComponentLink2Description=https://datasheet.ciiva.com/26322/vlmo1300-26322140.pdf?src-supplier=Element14, ComponentLink2URL=https://datasheet.ciiva.com/26322/vlmo1300-26322140.pdf?src-supplier=Element14, ComponentLink3Description=https://datasheet.ciiva.com/8028/vlmo1300-8028023.pdf?src-supplier=Element14, ComponentLink3URL=https://datasheet.ciiva.com/8028/vlmo1300-8028023.pdf?src-supplier=Element14, ComponentLink4Description=https://datasheet.ciiva.com/9333/vlmo1300-9333390.pdf?src-supplier=Avnet, ComponentLink4URL=https://datasheet.ciiva.com/9333/vlmo1300-9333390.pdf?src-supplier=Avnet, Copyright="Copyright (C) 2023 Ultra Librarian. All rights reserved.", Depth=0.8mm, Dominant Wavelength=571nm, Height=0.8mm, Illumination Color=Green,Yellow, Lead Free="Lead Free", Length=1.6mm, Lens Style=Rectangular,Clear, Luminous Intensity=35mcd, Manufacturer Part Number=VLMG1300-GS08, Manufacturer_Part_Number=VLMG1300-GS08, Mounting Technology="Surface Mount", Number of Elements=1, Number of LEDs=1, Packaging="Tape and Reel", Pins=2, Power Rating=75mW, Pricing="1=0.3, 10=0.237, 100=0.1065, 500=0.09616, 1000=0.07898 (USD)", Radiation Hardening=No, Reach SVHC Compliant=Unknown, RefDes=RefDes, RoHS=Yes, RoHS Compliant=Yes, Series=CHipLED, Stock=55201, Supplier=Digi-Key, Test Current=20mA, Type=DEV, Viewing Angle=130°, Wavelength=571nm, Width=0.8mm
CR2: library part VLMS1300-GS08, "LED RED 0603 SMD", Case Code (Imperial)=0603, Case Code (Metric)=1608, Color=Red, Forward Current=20mA, Forward Voltage=2V, LCSC Part#=C83242, Manufacturer="Vishay Semiconductors", Max Operating Temperature=85°C, Mfr_Name=Vishay, Min Operating Temperature=-35°C, Package Quantity=1, Power Rating=75mW, Supplier Part Number=VLMS1300-GS08CT-ND, Case/Package=0603, Category=LEDs, ComponentLink1Description=https://datasheet.ciiva.com/26322/vlmo1300-26322153.pdf?src-supplier=Element14, ComponentLink1URL=https://datasheet.ciiva.com/26322/vlmo1300-26322153.pdf?src-supplier=Element14, ComponentLink2Description=https://datasheet.ciiva.com/8028/vlmo1300-8028047.pdf?src-supplier=Element14, ComponentLink2URL=https://datasheet.ciiva.com/8028/vlmo1300-8028047.pdf?src-supplier=Element14, ComponentLink3Description=https://datasheet.ciiva.com/9333/vlmo1300-9333743.pdf?src-supplier=Avnet, ComponentLink3URL=https://datasheet.ciiva.com/9333/vlmo1300-9333743.pdf?src-supplier=Avnet, ComponentLink4Description=https://datasheet.ciiva.com/16510/vlmo1300-16510985.pdf?src-supplier=Future+Electronics, ComponentLink4URL=https://datasheet.ciiva.com/16510/vlmo1300-16510985.pdf?src-supplier=Future+Electronics, ComponentLink5Description=https://datasheet.ciiva.com/2114/vlmo1300-2114930.pdf?src-supplier=Digi-Key, ComponentLink5URL=https://datasheet.ciiva.com/2114/vlmo1300-2114930.pdf?src-supplier=Digi-Key, ComponentLink6Description=https://datasheet.ciiva.com/2114/vlmo1300-2114931.pdf?src-supplier=Digi-Key, ComponentLink6URL=https://datasheet.ciiva.com/2114/vlmo1300-2114931.pdf?src-supplier=Digi-Key, ComponentLink7Description=https://datasheet.ciiva.com/2114/vlmo1300-2114929.pdf?src-supplier=Digi-Key, ComponentLink7URL=https://datasheet.ciiva.com/2114/vlmo1300-2114929.pdf?src-supplier=Digi-Key, Copyright="Copyright (C) 2023 Ultra Librarian. All rights reserved.", Dominant Wavelength=631nm, Height=0.8mm, Illumination Color=Red, Lead Free="Lead Free", Length=1.6mm, Lens Style=Rectangular,Clear, Luminous Intensity=54mcd, Manufacturer Part Number=VLMS1300-GS08, Manufacturer_Part_Number=VLMS1300-GS08, Mounting Technology="Surface Mount", Number of LEDs=1, Packaging="Tape and Reel", Pricing="1=0.28, 10=0.223, 100=0.1002, 500=0.0905, 1000=0.07434 (USD)", Radiation Hardening=No, Reach SVHC Compliant=Unknown, RefDes=RefDes, RoHS=Yes, RoHS Compliant=Yes, Series=CHipLED, Stock=28800, Supplier=Digi-Key, Test Current=20mA, Type=DEV, Viewing Angle=130°, Wavelength=631nm, Width=0.8mm
D1 D2: "Rectifier Diode, Schottky, 1 Phase, 1 Element, 1A, 30V V(RRM), Silicon", Average Rectified Current=1A, Case/Package=SOD, LCSC Part#=C146335, Manufacturer=Toshiba, Max Operating Temperature=125°C, Max Reverse Current=500uA, Max Reverse Voltage (DC)=30V, Mfr_Name="Toshiba Electronic Devices & Storage Corp.", Min Operating Temperature=-55°C, Peak Non-Repetitive Surge Current=5A, Supplier Part Number=CUS10S30H3FCT-ND, Category="Rectifier Diodes", ComponentLink1Description=http://toshiba.semicon-storage.com/info/lookup.jsp?pid=CUS10S30&amp;lang=en&src-supplier=Mouser, ComponentLink1URL=http://toshiba.semicon-storage.com/info/lookup.jsp?pid=CUS10S30&amp;lang=en&src-supplier=Mouser, ComponentLink2Description=http://toshiba.semicon-storage.com/info/docget.jsp?did=14077&prodName=CUS10S30&src-supplier=Avnet, ComponentLink2URL=http://toshiba.semicon-storage.com/info/docget.jsp?did=14077&prodName=CUS10S30&src-supplier=Avnet, ComponentLink3Description=https://toshiba.semicon-storage.com/info/docget.jsp?did=14077&prodName=CUS10S30&src-supplier=Digi-Key, ComponentLink3URL=https://toshiba.semicon-storage.com/info/docget.jsp?did=14077&prodName=CUS10S30&src-supplier=Digi-Key, Contact Plating=Tin,Silver, Copyright="Copyright (C) 2023 Ultra Librarian. All rights reserved.", Manufacturer Part Number=CUS10S30,H3F, Manufacturer_Part_Number=CUS10S30,H3F, Mounting Technology="Surface Mount", Packaging="Cut Tape", Pins=2, Pricing="1=0.35, 10=0.243, 100=0.1228, 500=0.1002, 1000=0.07434 (USD)", RefDes=RefDes, RoHS=Yes, RoHS Compliant=Yes, Series=-, Stock=308991, Supplier=Digi-Key, Type=DEV
J1: "Conn Unshrouded Header HDR 4 POS 2.54mm Solder ST Top Entry SMD Tube", Color=Black, Flammability Rating="UL94 V-0", LCSC Part#=C3335977, Manufacturer=Samtec, Max Current Rating=7A, Max Operating Temperature=105°C, Max Voltage Rating (AC)=475V, Mfr_Name="Samtec Inc", Min Operating Temperature=-55°C, Package Quantity=1, Supplier Part Number=SAM8983-ND, Category="Headers and Wire Housings", ComponentLink1Description=https://datasheet.ciiva.com/739/tsm-1xx-xx-xxx-sv-xx-xxx-xx-mkt-739625.pdf?src-supplier=Digi-Key, ComponentLink1URL=https://datasheet.ciiva.com/739/tsm-1xx-xx-xxx-sv-xx-xxx-xx-mkt-739625.pdf?src-supplier=Digi-Key, Connector Type=Header, Contact Finish - Mating=TIN, Contact Material=Bronze, Contact Mating Length=0.23inch, Contact Plating=Tin, Contact Shape=Square, Contact Type="Male Pin", Copyright="Copyright (C) 2023 Ultra Librarian. All rights reserved.", Depth=2.54mm, Fastening Type=Pull, Gender=Male, Housing Color=Black, Housing Material=Polymer, Insulation Color=Black, Insulation Material=Polymer, Lead Free="Lead Free", Length=10.16mm, Manufacturer Part Number=TSM-104-01-T-SV, Manufacturer_Part_Number=TSM-104-01-T-SV, Mounting Technology="Surface Mount", Number of Contacts=4, Number of Positions=4, Number of Rows=1, Orientation=Straight, Packaging=Rail/Tube, Pitch=2.54mm, Pricing="1=0.65, 10=0.564, 100=0.4646, 500=0.404, 1000=0.3333, 5000=0.2929, 10000=0.2727 (USD)", Radiation Hardening=No, Reach SVHC Compliant=No, RefDes=RefDes, RoHS=Yes, RoHS Compliant=Yes, Series=TSM, Stock=1177, Supplier=Digi-Key, Termination=Solder, Type=DEV
Q1: library part KC2520Z40.0000C15XXK, "Xtal Osc Xo 40.0000MHZ Cmos SMD", LCSC Part#=C1857241, Manufacturer="Kyocera AVX", Supplier Part Number=478-KC2520Z40.0000C15XXKCT-ND, Category=Oscillators, Manufacturer Part Number=KC2520Z40.0000C15XXK, Pricing="1=1.16, 10=1.107, 50=1.0816, 100=0.927, 500=0.90124, 1000=0.75962 (USD)", RoHS=No, Stock=9175, Supplier=Digi-Key
R1 R2: library part ERJ-6GEYJ472V, "Res Thick Film 0805 4.7K Ohm 5% 1/8W ±200ppm/°C Molded SMD Punched Carrier T/R", Case Code (Imperial)=0805, Case Code (Metric)=2012, LCSC Part#=C230645, Manufacturer=Panasonic, Max Operating Temperature=155°C, Max Power Dissipation=125mW, Min Operating Temperature=-55°C, Package Quantity=1, Resistance Tolerance=5%, Resistor Type="Thick Film", Supplier Part Number=P4.7KACT-ND, Temperature Coefficient=200ppm/°C, Voltage Rating=150V, Case/Package=0805, Category="Chip SMD Resistors", Construction=Rectangular, Contact Plating=Tin, Depth=1.25mm, Height=0.6mm, Lead Free="Lead Free", Length=2mm, Manufacturer Part Number=ERJ-6GEYJ472V, Military Standard=Not, Mounting Technology="Surface Mount", Number of Terminations=2, Packaging="Tape and Reel", Power Rating=125mW, Pricing="1=0.1, 10=0.038, 50=0.0244, 100=0.0206, 500=0.01434, 1000=0.01248 (USD)", Radiation Hardening=No, Reach SVHC Compliant=No, RoHS=Yes, RoHS Compliant=Yes, Series=ERJ, Stock=148739, Supplier=Digi-Key, Technology="THICK FILM", Termination=SMD/SMT, Tolerance=5%, Voltage Rating (DC)=150V, Width=1.25mm
R3 R4: library part RC0603JR-13330RL, "Res Thick Film 0603 330 Ohm 5% 0.1W(1/10W) ±100ppm/C Pad SMD T/R", Case Code (Imperial)=0603, Case Code (Metric)=1608, LCSC Part#=C3995110, Manufacturer=Yageo, Max Operating Temperature=155°C, Min Operating Temperature=-55°C, Power Rating=100mW, Supplier Part Number=13-RC0603JR-13330RLCT-ND, Temperature Coefficient=100ppm/°C, Tolerance=5%, Voltage Rating=50V, Case/Package=0603, Category="Chip SMD Resistors", ComponentLink1Description=http://www.mouser.com/ds/2/447/RC0603-272842.pdf?src-supplier=Mouser, ComponentLink1URL=http://www.mouser.com/ds/2/447/RC0603-272842.pdf?src-supplier=Mouser, ComponentLink2Description=https://datasheet.octopart.com/RC0603JR-13330RL-Yageo-datasheet-164759695.pdf?src-supplier=Future+Electronics, ComponentLink2URL=https://datasheet.octopart.com/RC0603JR-13330RL-Yageo-datasheet-164759695.pdf?src-supplier=Future+Electronics, ComponentLink3Description=http://www.yageo.com/pdf/PYu-RC0603_51_RoHS_L_4.pdf?src-supplier=Avnet, ComponentLink3URL=http://www.yageo.com/pdf/PYu-RC0603_51_RoHS_L_4.pdf?src-supplier=Avnet, Contact Plating=Tin,Lead, Height=0.45mm, Lead Free="Lead Free", Length=1.6mm, Manufacturer Part Number=RC0603JR-13330RL, Packaging="Tape and Reel", Pricing="1=0.1, 10=0.015, 50=0.0092, 100=0.0076, 500=0.00512, 1000=0.00437, 5000=0.00314, 10000=0.00275 (USD)", RoHS=Yes, RoHS Compliant=Yes, Series=RC, Stock=83710, Supplier=Digi-Key, Termination=SMD/SMT, Width=0.8mm
R5 R7: library part RC0603FR-0760R4L, "Res Thick Film 0603 60.4 Ohm 1% 0.1W(1/10W) ±100ppm/C Pad SMD T/R", Case Code (Imperial)=0603, Case Code (Metric)=1608, LCSC Part#=C245987, Manufacturer=Yageo, Max Operating Temperature=155°C, Max Power Dissipation=100mW, Min Operating Temperature=-55°C, Supplier Part Number=311-60.4HRCT-ND, Temperature Coefficient=100ppm/°C, Tolerance=1%, Voltage Rating=50V, Case/Package=0603, Category="Chip SMD Resistors", ComponentLink1Description=https://datasheet.ciiva.com/12558/rc0603-272842-12558933.pdf?src-supplier=Mouser, ComponentLink1URL=https://datasheet.ciiva.com/12558/rc0603-272842-12558933.pdf?src-supplier=Mouser, Features="Moisture Resistant", Height=0.45mm, Lead Free="Lead Free", Length=1.6mm, Manufacturer Part Number=RC0603FR-0760R4L, Number of Terminations=2, Packaging="Tape and Reel", Power Rating=100mW, Pricing="1=0.1, 10=0.019, 50=0.0112, 100=0.0093, 500=0.00622, 1000=0.00532 (USD)", RoHS=Yes, RoHS Compliant=Yes, Series=RC, Stock=143040, Supplier=Digi-Key, Termination=SMD/SMT, Voltage Rating (DC)=50V, Width=0.8mm
R6: library part RC0603JR-0710KL, "SMD Chip Resistor, 10 kOhm, ± 5%, 100 mW, 0603 [1608 Metric], Thick Film, General Purpose", Case/Package=0603, LCSC Part#=C99198, Manufacturer=Yageo, Max Operating Temperature=155°C, Max Power Dissipation=100mW, Min Operating Temperature=-55°C, Supplier Part Number=311-10KGRCT-ND, Temperature Coefficient=100ppm/°C, Tolerance=5%, Voltage Rating (AC)=50V, Category="Chip SMD Resistors", ComponentLink1Description=https://datasheet.ciiva.com/2452/pyu-rc-group-51-rohs-l-10-2452848.pdf?src-supplier=Digi-Key, ComponentLink1URL=https://datasheet.ciiva.com/2452/pyu-rc-group-51-rohs-l-10-2452848.pdf?src-supplier=Digi-Key, Manufacturer Part Number=RC0603JR-0710KL, Number of Terminations=2, Pricing="1=0.1, 10=0.015, 50=0.0092, 100=0.0076, 500=0.00512, 1000=0.00437 (USD)", Reach SVHC Compliant=4187SVHC, RoHS=Yes, RoHS Compliant=Yes, Series=RC, Stock=3736571, Supplier=Digi-Key
SW1: library part CS-4-22YTB, "Switch Rotary ON OFF ON DPDT 2 Flush Screwdriver Gull Wing 0.1A 16VAC 16VDC 0.5VA T/R", LCSC Part#=C2921707, Manufacturer="Nidec Copal", Max Operating Temperature=70°C, Mfr_Name="Nidec Copal Electronics", Min Operating Temperature=-25°C, Supplier Part Number=563-1040-1-ND, Voltage Rating (DC)=16V, Actuator Type=Rotary, Body Material=Epoxy, Category="DIP Switches", ComponentLink1Description=https://datasheet.ciiva.com/2864/cs-4-2864257.pdf?src-supplier=Digi-Key, ComponentLink1URL=https://datasheet.ciiva.com/2864/cs-4-2864257.pdf?src-supplier=Digi-Key, ComponentLink2Description=https://datasheet.ciiva.com/2864/cs-4-2864258.pdf?src-supplier=Digi-Key, ComponentLink2URL=https://datasheet.ciiva.com/2864/cs-4-2864258.pdf?src-supplier=Digi-Key, ComponentLink3Description=https://datasheet.ciiva.com/2864/cs-4-2864259.pdf?src-supplier=Digi-Key, ComponentLink3URL=https://datasheet.ciiva.com/2864/cs-4-2864259.pdf?src-supplier=Digi-Key, Contact Material="Copper Alloy", Contact Plating=Gold, Copyright="Copyright (C) 2023 Ultra Librarian. All rights reserved.", Electrical Life=200Cycles, Lead Free="Lead Free", Manufacturer Part Number=CS-4-22YTB, Manufacturer_Part_Number=CS-4-22YB, Mounting Technology="Surface Mount", Number of Positions=2, Orientation=Vertical, Packaging="Cut Tape", Pricing="1=2.85, 10=2.683, 25=2.4392, 100=2.1139, 250=1.91648 (USD)", RefDes=RefDes, RoHS=Yes, RoHS Compliant=Yes, Series=CS-4, Stock=6353, Supplier=Digi-Key, Termination="Gull Wing", Throw Configuration=DPDT, Type=DEV, Washable=Yes
TP1 TP2 TP6 TP9 TP14 TP15 TP20 TP26: library part TestPoint_1mm
U1: library part LDC1612, "2-Ch, 28-bit, high-resolution Inductance to digital converter 12-WSON -40 to 125", LCSC Part#=C1847959, Manufacturer="Texas Instruments", Manufacturer Part Number=LDC1612DNTR, Max Operating Temperature=125°C, Min Operating Temperature=-40°C, Package=WSON-12, Supplier Part Number=296-LDC1612DNCT-ND, Category="Integrated Circuits (ICs)", ComponentLink2Description=http://www.ti.com/general/docs/suppproductinfo.tsp?distId=10&amp;gotoUrl=http%3A%2F%2Fwww.ti.com%2Flit%2Fgpn%2Fldc1612&src-supplier=Digi-Key, ComponentLink2URL=http://www.ti.com/general/docs/suppproductinfo.tsp?distId=10&amp;gotoUrl=http%3A%2F%2Fwww.ti.com%2Flit%2Fgpn%2Fldc1612&src-supplier=Digi-Key, ComponentLink3Description=http://www.ti.com/general/docs/lit/getliterature.tsp?genericPartNumber=LDC1614&&fileType=pdf&src-supplier=Avnet, ComponentLink3URL=http://www.ti.com/general/docs/lit/getliterature.tsp?genericPartNumber=LDC1614&&fileType=pdf&src-supplier=Avnet, ComponentLink4Description=http://www.ti.com/lit/gpn/ldc1612?src-supplier=Mouser, ComponentLink4URL=http://www.ti.com/lit/gpn/ldc1612?src-supplier=Mouser, Interface=I2C, Lead Free="Lead Free", Mounting Technology="Surface Mount", Number of Channels=2, Number of Inputs=2, Packaging="Tape and Reel", Pins=12, Pricing="1=3.68, 10=3.305, 25=3.1248, 100=2.7081, 250=2.5692, 500=2.30532, 1000=1.94425 (USD)", RoHS=Yes, RoHS Compliant=Yes, Stock=21433, Supplier=Digi-Key
U2: "ARM® Cortex®-M0 STM32 F0 Microcontroller IC 32-Bit 48MHz 32KB (32K x 8) FLASH 32-LQFP (7x7)", Case/Package=LQFP, Clock Frequency=48MHz, LCSC Part#=C1337340, Manufacturer=STMicroelectronics, Max Operating Temperature=105°C, Max Power Dissipation=351mW, Max Supply Voltage=3.6V, Min Operating Temperature=-40°C, Min Supply Voltage=2V, Supplier Part Number=497-18516-ND, Category=Microcontrollers, ComponentLink1Description=http://www.farnell.com/datasheets/2281753.pdf?src-supplier=Farnell, ComponentLink1URL=http://www.farnell.com/datasheets/2281753.pdf?src-supplier=Farnell, ComponentLink2Description=http://www.mouser.com/ds/2/389/stm32f042c4-956225.pdf?src-supplier=Mouser, ComponentLink2URL=http://www.mouser.com/ds/2/389/stm32f042c4-956225.pdf?src-supplier=Mouser, ComponentLink3Description=http://www.st.com/content/ccc/resource/technical/document/datasheet/52/ad/d0/80/e6/be/40/ad/DM00105814.pdf/files/DM00105814.pdf/jcr:content/translations/en.DM00105814.pdf?src-supplier=Digi-Key, ComponentLink3URL=http://www.st.com/content/ccc/resource/technical/document/datasheet/52/ad/d0/80/e6/be/40/ad/DM00105814.pdf/files/DM00105814.pdf/jcr:content/translations/en.DM00105814.pdf?src-supplier=Digi-Key, ComponentLink4Description=http://www.st.com/st-web-ui/static/active/en/resource/technical/document/datasheet/DM00105814.pdf?src-supplier=Avnet, ComponentLink4URL=http://www.st.com/st-web-ui/static/active/en/resource/technical/document/datasheet/DM00105814.pdf?src-supplier=Avnet, ComponentLink5Description=http://www.farnell.com/datasheets/1886881.pdf?src-supplier=Element14, ComponentLink5URL=http://www.farnell.com/datasheets/1886881.pdf?src-supplier=Element14, ComponentLink6Description=http://www.farnell.com/datasheets/2281753.pdf?src-supplier=Newark, ComponentLink6URL=http://www.farnell.com/datasheets/2281753.pdf?src-supplier=Newark, ComponentLink7Description=https://datasheet.octopart.com/STM32F042K6T7-STMicroelectronics-datasheet-62336640.pdf?src-supplier=LKR, ComponentLink7URL=https://datasheet.octopart.com/STM32F042K6T7-STMicroelectronics-datasheet-62336640.pdf?src-supplier=LKR, ComponentLink8Description=https://datasheet.octopart.com/STM32F042K6T7-STMicroelectronics-datasheet-82511004.pdf?src-supplier=SHENGYU+ELECTRONICS, ComponentLink8URL=https://datasheet.octopart.com/STM32F042K6T7-STMicroelectronics-datasheet-82511004.pdf?src-supplier=SHENGYU+ELECTRONICS, Copyright="Copyright (C) 2023 Ultra Librarian. All rights reserved.", Core Architecture=ARM, Data Bus Width=32b, Frequency=48MHz, Interface=I2C,SPI,USB,CAN,HDMI,IrDA,UART,USART,LIN,I2S, Lead Free="Lead Free", Manufacturer Part Number=STM32F042K6T7, Manufacturer_Part_Number=STM32F042K6T7, Memory Format=FLASH, Memory Size=32KB, Mfr_Name=STMicroelectronics, Number of I/Os=26, Number of Programmable I/O=26, Number of Timers/Counters=6, Oscillator Type=Internal, Packaging=Tray, Peripherals=POR,PWM,WDT,DMA, Pins=32, Pricing="1=4.08, 10=3.669, 25=3.4684, 80=3.00588, 250=2.85172, 500=2.55882, 1000=2.15805, 2500=2.05014, 5000=1.97307 (USD)", Radiation Hardening=No, RAM Size=6KB, Reach SVHC Compliant=No, RefDes=RefDes, RoHS=Yes, RoHS Compliant=Yes, Series="STM32 F0", Stock=2881, Supplier=Digi-Key, Type=DEV, Watchdog Timer=Yes
U3: "EAR99 65HVD230 Cut Tape (CT) CANbus interface driver 3.3V 17mA 72.603129mg 1Mbps", Case/Package=D, LCSC Part#=C12084, Manufacturer="Texas Instruments", Max Operating Temperature=85°C, Max Supply Voltage=3.6V, Min Operating Temperature=-40°C, Min Supply Voltage=3V, Operating Supply Voltage=3.3V, Package Quantity=1, Supplier Part Number=296-11654-6-ND, Supply Current=17mA, Category="Interface ICs", ComponentLink1Description=https://datasheet.ciiva.com/3303/slos346k-3303008.pdf?src-supplier=Avnet, ComponentLink1URL=https://datasheet.ciiva.com/3303/slos346k-3303008.pdf?src-supplier=Avnet, ComponentLink2Description=https://datasheet.ciiva.com/28652/1695240-28652369.pdf?src-supplier=Element14, ComponentLink2URL=https://datasheet.ciiva.com/28652/1695240-28652369.pdf?src-supplier=Element14, ComponentLink3Description=https://datasheet.ciiva.com/4781/sn65hvd230-86923-4781328.pdf?src-supplier=Mouser, ComponentLink3URL=https://datasheet.ciiva.com/4781/sn65hvd230-86923-4781328.pdf?src-supplier=Mouser, ComponentLink4Description=https://datasheet.ciiva.com/27052/1495682-27052294.pdf?src-supplier=Jameco, ComponentLink4URL=https://datasheet.ciiva.com/27052/1495682-27052294.pdf?src-supplier=Jameco, ComponentLink5Description=https://datasheet.ciiva.com/1705/sn65hvd230-1705286.pdf?src-supplier=Digi-Key, ComponentLink5URL=https://datasheet.ciiva.com/1705/sn65hvd230-1705286.pdf?src-supplier=Digi-Key, ComponentLink6Description=https://datasheet.ciiva.com/1705/sn65hvd230-1705287.pdf?src-supplier=Digi-Key, ComponentLink6URL=https://datasheet.ciiva.com/1705/sn65hvd230-1705287.pdf?src-supplier=Digi-Key, ComponentLink7Description=https://datasheet.ciiva.com/1705/sn65hvd230-1705288.pdf?src-supplier=Digi-Key, ComponentLink7URL=https://datasheet.ciiva.com/1705/sn65hvd230-1705288.pdf?src-supplier=Digi-Key, ComponentLink8Description=https://datasheet.ciiva.com/22694/1887486-22694362.pdf?src-supplier=Element14, ComponentLink8URL=https://datasheet.ciiva.com/22694/1887486-22694362.pdf?src-supplier=Element14, ComponentLink9Description=https://datasheet.ciiva.com/15150/getdatasheetpartid-393721-15150028.pdf?src-supplier=Verical, ComponentLink9URL=https://datasheet.ciiva.com/15150/getdatasheetpartid-393721-15150028.pdf?src-supplier=Verical, Data Rate=1Mbps, Height=1.75mm, Lead Free="Lead Free", Length=4.9mm, Manufacturer Part Number=SN65HVD230DR, Number of Drivers=1, Number of I/Os=2, Number of Receive Buffers=1, Number of Receivers=1, Number of Transceivers=1, Number of Transmit Buffers=1, Packaging="Tape and Reel", Pins=8, Pricing="1=2.5, 10=2.248, 25=2.1208, 100=1.8071, 250=1.6968, 500=1.4847, 1000=1.23018 (USD)", Radiation Hardening=No, Reach SVHC Compliant=No, RoHS=Yes, RoHS Compliant=Yes, Series=-, Slew Rate=15V/µs, Stock=82408, Supplier=Digi-Key, Termination=SMD/SMT, Thickness=1.58mm, Weight=0.002561oz, Width=3.91mm